# EAGLE board untitled (EAGLE 6.4)
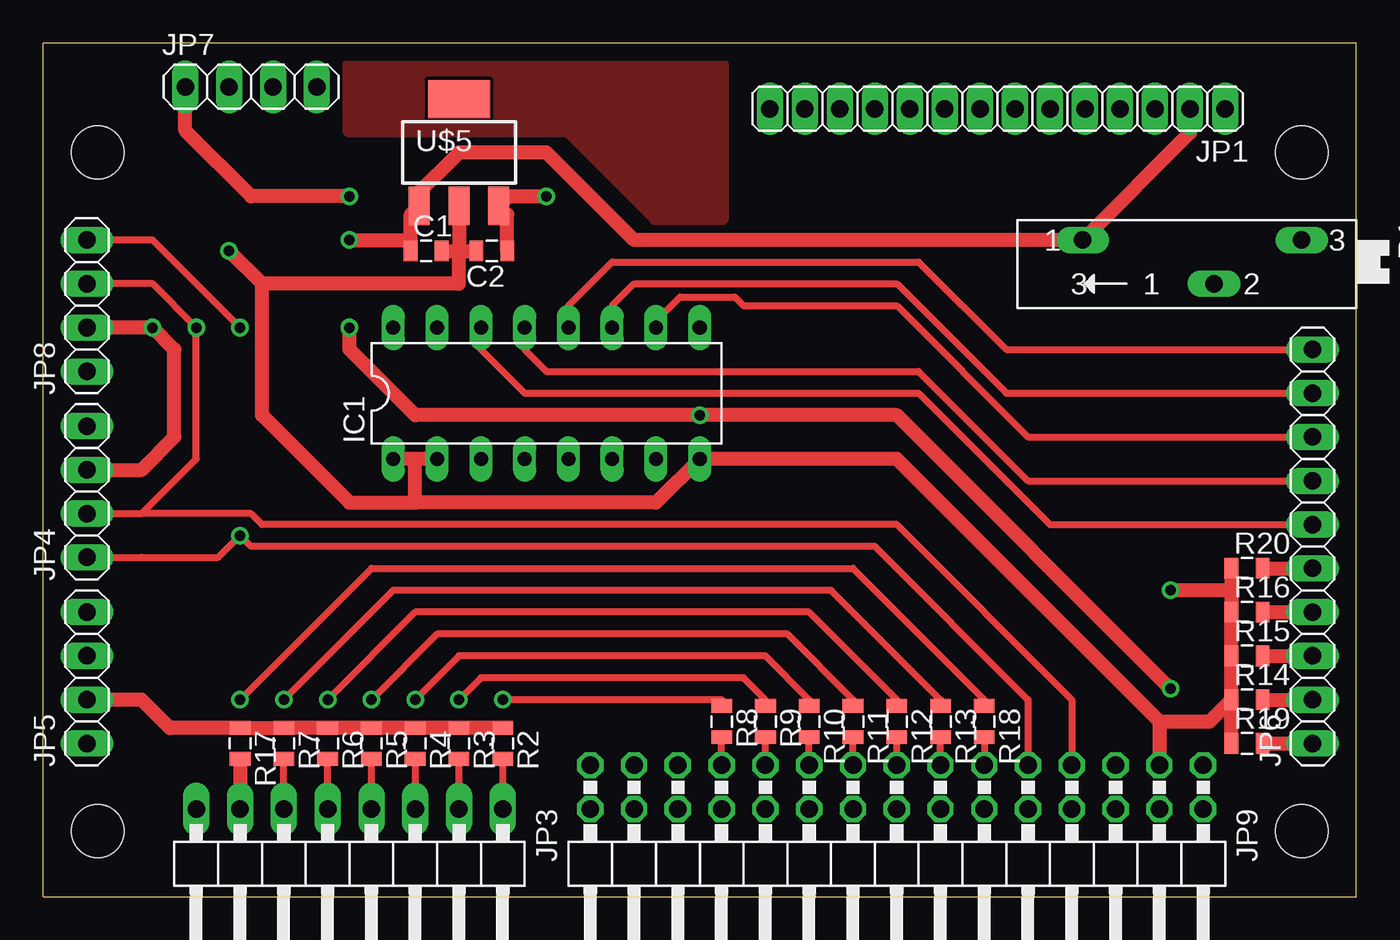
[diagram p0: board, top side]
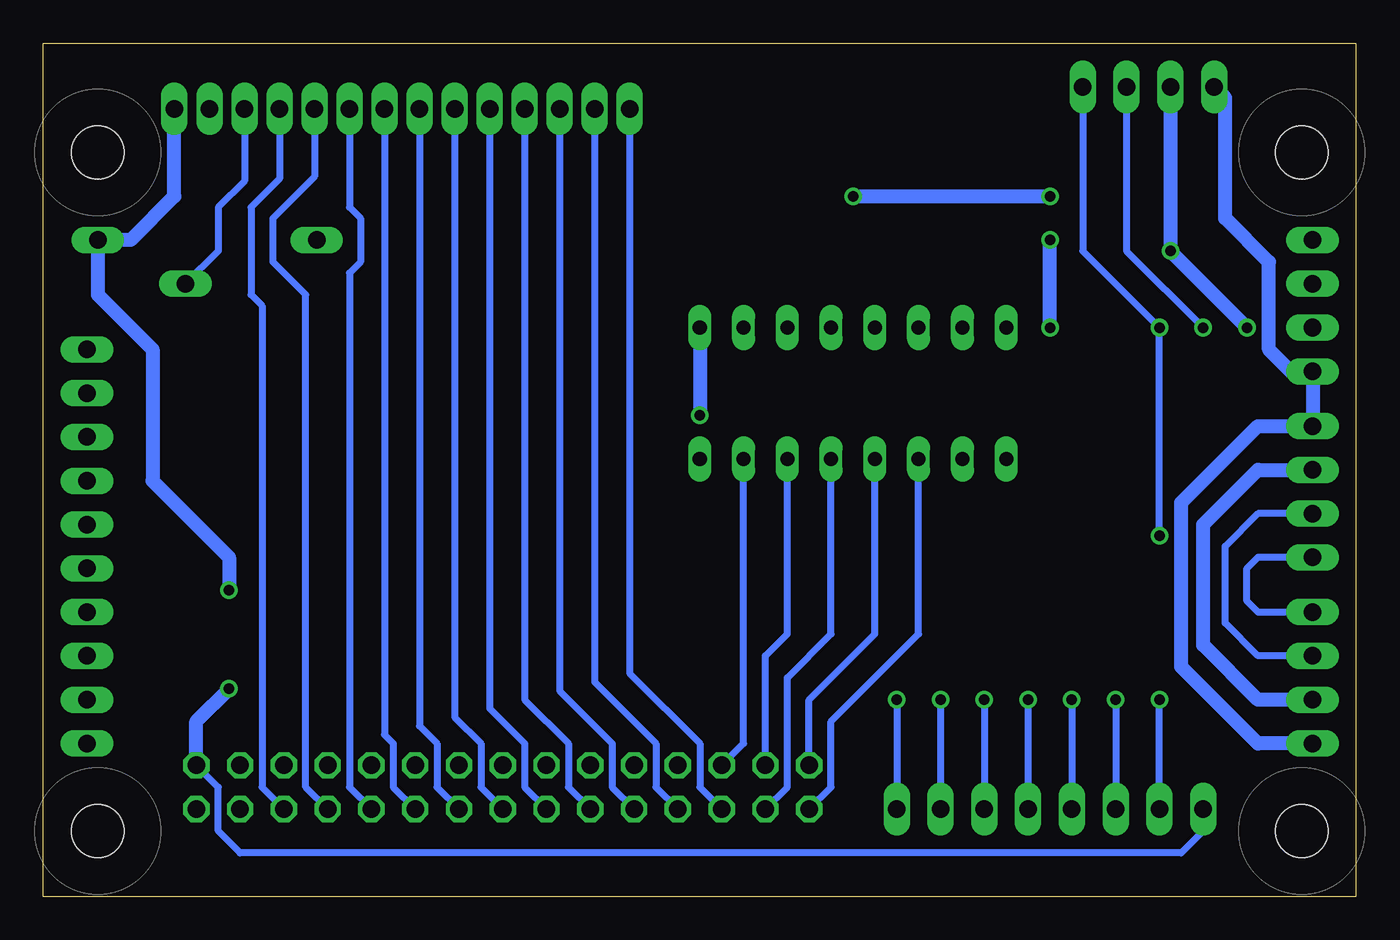
[diagram p1: board, bottom side, seen from below]

Size 76.2 x 49.53 mm. Coordinates in mm from the lower left corner, seen from the top.
Outline: 0,0 76.2,0 76.2,49.53 0,49.53 0,0
Copper layers (1*16): Top 0.035mm / dielectric 1.5mm / Bottom 0.035mm
Design rules "default *": minimum track width 10mil, minimum drill 24mil, track to track 8mil, track to pad 8mil, pad to pad 8mil, via to via 8mil, smd to smd 8mil, copper to edge 40mil, drill to drill 8mil, minimum pad ring 10mil, minimum via ring 8mil, stop-mask expansion 4mil, vias tented up to drill 0mil, thermal gap 10mil

## Footprints (pad centres in the part's own frame; a part is rotated, then mirrored left to right if it is on the bottom)
0805 = smd 0.8 x 1.2: 1 -0.9,0; 2 0.9,0
DIL16 = drill 0.813 long: 1 -8.89,-3.81; 2 -6.35,-3.81; 3 -3.81,-3.81; 4 -1.27,-3.81; 5 1.27,-3.81; 6 3.81,-3.81; 7 6.35,-3.81; 8 8.89,-3.81; 9 8.89,3.81; 10 6.35,3.81; 11 3.81,3.81; 12 1.27,3.81; 13 -1.27,3.81; 14 -3.81,3.81; 15 -6.35,3.81; 16 -8.89,3.81
1X14 = drill 1.016 long: 1 -16.51,0; 2 -14.478,0; 3 -12.446,0; 4 -10.414,0; 5 -8.382,0; 6 -6.35,0; 7 -4.318,0; 8 -2.286,0; 9 -0.254,0; 10 1.778,0; 11 3.81,0; 12 5.842,0; 13 7.874,0; 14 9.906,0
1X08/90 = drill 1.016 long: 1 -8.89,-3.81; 2 -6.35,-3.81; 3 -3.81,-3.81; 4 -1.27,-3.81; 5 1.27,-3.81; 6 3.81,-3.81; 7 6.35,-3.81; 8 8.89,-3.81
1X04 = drill 1.016 long: 1 -3.175,0; 2 -0.635,0; 3 1.905,0; 4 4.445,0
1X10 = drill 1.016 long: 1 -11.43,0; 2 -8.89,0; 3 -6.35,0; 4 -3.81,0; 5 -1.27,0; 6 1.27,0; 7 3.81,0; 8 6.35,0; 9 8.89,0; 10 11.43,0
2X15/90 = drill 1.016 octagon: 1 -17.78,-6.35; 2 -17.78,-3.81; 3 -15.24,-6.35; 4 -15.24,-3.81; 5 -12.7,-6.35; 6 -12.7,-3.81; 7 -10.16,-6.35; 8 -10.16,-3.81; 9 -7.62,-6.35; 10 -7.62,-3.81; 11 -5.08,-6.35; 12 -5.08,-3.81; 13 -2.54,-6.35; 14 -2.54,-3.81; 15 0,-6.35; 16 0,-3.81; 17 2.54,-6.35; 18 2.54,-3.81; 19 5.08,-6.35; 20 5.08,-3.81; 21 7.62,-6.35; 22 7.62,-3.81; 23 10.16,-6.35; 24 10.16,-3.81; 25 12.7,-6.35; 26 12.7,-3.81; 27 15.24,-6.35; 28 15.24,-3.81; 29 17.78,-6.35; 30 17.78,-3.81
SP19L = drill 1.016 long: A 5.715,-1.27; E -6.985,-1.27; S -1.905,1.27
STAND-OFF-TIGHT = hole 3.048: 0,0
SOT223 = smd 1.219 x 2.235: 1 -2.311,-3.099; 2 0,-3.099; 3 2.311,-3.099 | smd 3.6 x 2.2: 4 0,3.099

## Placement (x,y rotation side)
C1  [0805]  22.23,37.47 0 top
C2  [0805]  26.04,37.47 180 top
IC1  ULN2004AN  [DIL16]  29.21,29.21 0 top
JP1  [1X14]  52.07,45.72 180 top
JP3  [1X08/90]  17.78,1.27 180 top
JP4  [1X04]  2.54,22.86 90 top
JP5  [1X04]  2.54,12.06 90 top
JP6  [1X10]  73.66,20.32 90 top
JP7  [1X04]  11.43,46.99 0 top
JP8  [1X04]  2.54,33.66 90 top
JP9  [2X15/90]  49.53,1.27 180 top
R1  [SP19L]  66.04,36.83 180 top
R2  [0805]  26.67,8.89 270 top
R3  [0805]  24.13,8.89 270 top
R4  [0805]  21.59,8.89 270 top
R5  [0805]  19.05,8.89 270 top
R6  [0805]  16.51,8.89 270 top
R7  [0805]  13.97,8.89 270 top
R8  [0805]  39.37,10.16 270 top
R9  [0805]  41.91,10.16 270 top
R10  [0805]  44.45,10.16 270 top
R11  [0805]  46.99,10.16 270 top
R12  [0805]  49.53,10.16 270 top
R13  [0805]  52.07,10.16 270 top
R14  [0805]  69.85,11.43 0 top
R15  [0805]  69.85,13.97 0 top
R16  [0805]  69.85,16.51 0 top
R17  [0805]  11.43,8.89 270 top
R18  [0805]  54.61,10.16 270 top
R19  [0805]  69.85,8.89 0 top
R20  [0805]  69.85,19.05 0 top
U$1  [STAND-OFF-TIGHT]  3.17,43.18 0 top
U$2  [STAND-OFF-TIGHT]  73.03,43.18 0 top
U$3  [STAND-OFF-TIGHT]  3.17,3.81 0 top
U$4  [STAND-OFF-TIGHT]  73.03,3.81 0 top
U$5  LM3940IMP-3.3  [SOT223]  24.13,43.18 0 top

## Library data of the parts
C1 C2 R2-R20 U$1-U$4 = ASL
IC1 = uln-udn
JP1 JP4 JP5 JP7 JP8 = pinhead_non_standard
JP3 JP6 JP9 = pinhead
R1 = pot
U$5 = LM3940

## Nets
3.3V: C2.1 JP4.4 JP5.1 JP7.1 JP8.1 U$5.3
GND: C1.2 C2.2 IC1.1 IC1.2 IC1.8 JP1.1 JP4.3 JP5.2 JP7.2 JP8.2 JP9.3 R1.E R2.1 R3.1 R4.1 R5.1 R6.1 R7.1 R14.1 R15.1 R16.1 R17.1 R19.1 R20.1 U$5.2
N$1: JP1.3 R1.S
N$2: JP3.1 R2.2 R8.1
N$3: JP3.2 R3.2 R9.1
N$4: JP1.4 JP9.6
N$5: JP1.5 JP9.8
N$6: JP1.6 JP9.10
N$7: JP1.7 JP9.12
N$8: JP4.1 JP5.4 JP7.4 JP8.4 JP9.9
N$9: JP1.8 JP9.14
N$10: JP1.9 JP9.16
N$11: JP1.10 JP9.18
N$12: JP1.11 JP9.20
N$13: JP1.12 JP9.22
N$14: JP1.13 JP9.24
N$15: JP3.3 R4.2 R10.1
N$16: JP3.4 R5.2 R11.1
N$17: JP3.5 R6.2 R12.1
N$18: JP3.6 R7.2 R13.1
N$19: JP9.13 R13.2
N$20: JP9.15 R12.2
N$21: JP9.17 R11.2
N$22: JP9.19 R10.2
N$23: JP9.21 R9.2
N$24: JP9.23 R8.2
N$25: JP1.14 JP9.26
N$26: JP3.7 R17.2 R18.1
N$27: IC1.7 JP9.25
N$28: JP6.2 R14.2
N$29: JP6.3 R15.2
N$30: JP6.4 R16.2
N$31: IC1.12 JP6.10
N$32: IC1.5 JP9.28
N$33: JP4.2 JP5.3 JP7.3 JP8.3 JP9.7
N$35: JP9.11 R18.2
N$36: JP6.1 R19.2
N$37: JP6.5 R20.2
N$38: IC1.4 JP9.29
N$39: IC1.3 JP9.30
N$40: IC1.10 JP6.8
N$41: IC1.11 JP6.9
N$43: IC1.13 JP6.7
N$44: IC1.14 JP6.6
N$46: IC1.6 JP9.27
VCC: C1.1 IC1.9 JP1.2 JP3.8 JP9.1 R1.A U$5.1

## Tracks (layer width: path | path; a pad name or v marks a point on that pad's centre or on a via)
3.3V  (via drill 0.61)
  Top 0.813: C2.1 26.93,39.59 U$5.3 27,40.64 v29.21,40.64 | v17.78,40.64 12.06,40.64 8.26,44.45 JP7.1
  Bottom 0.813: JP5.1 5.71,8.89 10.16,13.34 10.16,22.86 5.71,27.3 JP4.4 JP8.1 3.81,30.48 5.08,31.75 5.08,36.83 7.62,39.37 7.62,46.35 JP7.1 | v29.21,40.64 v17.78,40.64
GND  (via drill 0.61)
  Top 0.813: R2.1 R3.1 R4.1 R5.1 R6.1 R7.1 R17.1 7.36,9.79 5.71,11.43 JP5.2 | R14.1 R15.1 R16.1 68.95,17.78 | JP4.3 5.71,24.77 7.62,26.67 7.62,31.75 v6.35,33.02 JP8.2 | 64.77,10.16 JP9.3 | C1.2 24.13,37.47 | 24.13,37.47 C2.2 | U$5.2 24.13,37.47 | 12.7,35.56 24.13,35.56 24.13,37.47 | 64.77,10.16 67.68,10.16 R14.1 | R19.1 R14.1 | 64.77,10.16 49.53,25.4 IC1.8 35.56,22.86 21.59,22.86 | 12.7,35.56 12.7,27.94 17.78,22.86 21.59,22.86 | R20.1 68.95,17.78 | v10.79,37.47 12.7,35.56 | IC1.2 21.59,25.4 | 21.59,25.4 IC1.1 | 21.59,22.86 21.59,25.4 | 68.95,17.78 v65.41,17.78
  Bottom 0.813: JP5.2 5.71,11.43 8.89,14.61 8.89,21.59 5.71,24.77 JP4.3 | JP7.2 v10.79,37.47 v6.35,33.02 | JP1.1 68.58,40.64 71.12,38.1 R1.E 73.03,34.92 69.85,31.75 69.85,24.13 65.41,19.68 v65.41,17.78
N$1
  Bottom 0.406: R1.S 66.04,37.47 66.04,40.01 64.52,41.53 JP1.3
N$2  (via drill 0.61)
  Top 0.406: R2.2 JP3.1 | R8.1 39.37,11.43 v26.67,11.43
  Bottom 0.406: v26.67,11.43 JP3.1
N$3  (via drill 0.61)
  Top 0.406: JP3.2 R3.2 | R9.1 41.91,11.43 40.64,12.7 25.4,12.7 v24.13,11.43
  Bottom 0.406: v24.13,11.43 JP3.2
N$4
  Bottom 0.406: JP1.4 62.48,41.66 64.14,40.01 64.14,34.92 63.5,34.29 63.5,6.35 JP9.6
N$5
  Bottom 0.406: JP1.5 60.45,41.78 62.87,39.37 62.87,36.83 60.96,34.92 60.96,6.35 JP9.8
N$6
  Bottom 0.406: JP1.6 58.42,40.01 57.78,39.37 57.78,36.83 58.42,36.2 58.42,6.35 JP9.10
N$7
  Bottom 0.406: JP1.7 56.39,9.4 55.88,8.89 55.88,6.35 JP9.12
N$8  (via drill 0.61)
  Top 0.406: 5.71,19.68 JP4.1 10.16,19.68 v11.43,20.95 12.06,20.32 48.26,20.32 57.15,11.43 JP9.9 | v11.43,33.02 6.35,38.1 JP8.4
  Bottom 0.406: JP4.1 5.71,19.68 6.35,19.05 6.35,17.14 5.71,16.51 JP5.4 | JP7.4 15.88,37.47 v11.43,33.02 v11.43,20.95
N$9
  Bottom 0.406: JP1.8 54.36,9.91 53.34,8.89 53.34,6.35 JP9.14
N$10
  Bottom 0.406: JP1.9 52.32,10.41 50.8,8.89 50.8,6.35 JP9.16
N$11
  Bottom 0.406: JP1.10 50.29,10.92 48.26,8.89 48.26,6.35 JP9.18
N$12
  Bottom 0.406: JP1.11 48.26,11.43 45.72,8.89 45.72,6.35 JP9.20
N$13
  Bottom 0.406: JP1.12 46.23,11.94 43.18,8.89 43.18,6.35 JP9.22
N$14
  Bottom 0.406: JP1.13 44.2,12.45 40.64,8.89 40.64,6.35 JP9.24
N$15  (via drill 0.61)
  Top 0.406: R4.2 JP3.3 | R10.1 44.45,11.43 41.91,13.97 24.13,13.97 v21.59,11.43
  Bottom 0.406: v21.59,11.43 JP3.3
N$16  (via drill 0.61)
  Top 0.406: JP3.4 R5.2 | R11.1 46.99,11.43 43.18,15.24 22.86,15.24 v19.05,11.43
  Bottom 0.406: v19.05,11.43 JP3.4
N$17  (via drill 0.61)
  Top 0.406: JP3.5 R6.2 | R12.1 49.53,11.43 44.45,16.51 21.59,16.51 v16.51,11.43
  Bottom 0.406: v16.51,11.43 JP3.5
N$18  (via drill 0.61)
  Top 0.406: JP3.6 R7.2 | R13.1 52.07,11.43 45.72,17.78 20.32,17.78 v13.97,11.43
  Bottom 0.406: v13.97,11.43 JP3.6
N$19
  Top 0.406: JP9.13 R13.2
N$20
  Top 0.406: JP9.15 R12.2
N$21
  Top 0.406: JP9.17 R11.2
N$22
  Top 0.406: JP9.19 R10.2
N$23
  Top 0.406: JP9.21 R9.2
N$24
  Top 0.406: JP9.23 R8.2
N$25
  Bottom 0.406: JP1.14 42.16,12.95 38.1,8.89 38.1,6.35 JP9.26
N$26  (via drill 0.61)
  Top 0.406: v11.43,11.43 19.05,19.05 46.99,19.05 54.61,11.43 R18.1
  Top 0.813: R17.2 JP3.7
  Bottom 0.406: JP3.7 v11.43,11.43
N$27
  Bottom 0.406: IC1.7 35.56,8.89 JP9.25
N$28
  Top 0.813: R14.2 JP6.2
N$29
  Top 0.813: R15.2 JP6.3
N$30
  Top 0.813: R16.2 JP6.4
N$31
  Top 0.406: IC1.12 30.48,34.29 33.02,36.83 50.8,36.83 55.88,31.75 JP6.10
N$32
  Bottom 0.406: JP9.28 33.02,6.35 33.02,12.7 30.48,15.24 IC1.5
N$33  (via drill 0.61)
  Top 0.406: JP4.2 5.71,22.23 | 5.71,22.23 8.89,25.4 v8.89,33.02 6.35,35.56 JP8.3 | 5.71,22.23 12.06,22.23 12.7,21.59 49.53,21.59 59.69,11.43 JP9.7
  Bottom 0.406: JP4.2 5.71,22.23 7.62,20.32 7.62,15.88 5.71,13.97 JP5.3 | JP7.3 13.34,37.47 v8.89,33.02
N$34
  pour Top: 17.78,44.45 17.78,48.26 39.37,48.26 39.37,39.37 35.56,39.37 30.48,44.45
N$35
  Top 0.406: R18.2 JP9.11
N$36
  Top 0.813: R19.2 JP6.1
N$37
  Top 0.813: R20.2 JP6.5
N$38
  Bottom 0.406: JP9.29 31.75,11.43 27.94,15.24 IC1.4
N$39
  Bottom 0.406: JP9.30 30.48,6.35 30.48,10.16 25.4,15.24 IC1.3
N$40
  Top 0.406: IC1.10 35.56,33.4 36.96,34.8 40.13,34.8 40.64,34.29 49.53,34.29 57.15,26.67 JP6.8
N$41
  Top 0.406: IC1.11 33.02,34.29 34.29,35.56 49.53,35.56 55.88,29.21 JP6.9
N$43
  Top 0.406: IC1.13 27.94,31.75 29.21,30.48 50.8,30.48 57.15,24.13 JP6.7
N$44
  Top 0.406: IC1.14 25.4,31.75 27.94,29.21 50.8,29.21 58.42,21.59 JP6.6
N$46
  Bottom 0.406: JP9.27 34.29,13.97 33.02,15.24 IC1.6
VCC  (via drill 0.61)
  Top 0.813: JP1.2 66.55,44.32 R1.A 34.29,38.1 29.21,43.18 24.13,43.18 21.59,40.64 21.59,40.31 U$5.1 21.32,39.59 21.32,38.1 | C1.1 21.32,38.1 | v65.41,12.06 49.53,27.94 v38.1,27.94 21.59,27.94 17.78,31.75 v17.78,33.02 | v17.78,38.1 21.32,38.1
  Bottom 0.406: JP3.8 8.89,3.81 10.16,2.54 64.77,2.54 66.04,3.81 66.04,6.35 JP9.1
  Bottom 0.813: v65.41,12.06 67.31,10.16 JP9.1 | v17.78,33.02 v17.78,38.1 | IC1.9 v38.1,27.94